# EAGLE board EndingsNanaPanel (EAGLE 9.6.2)
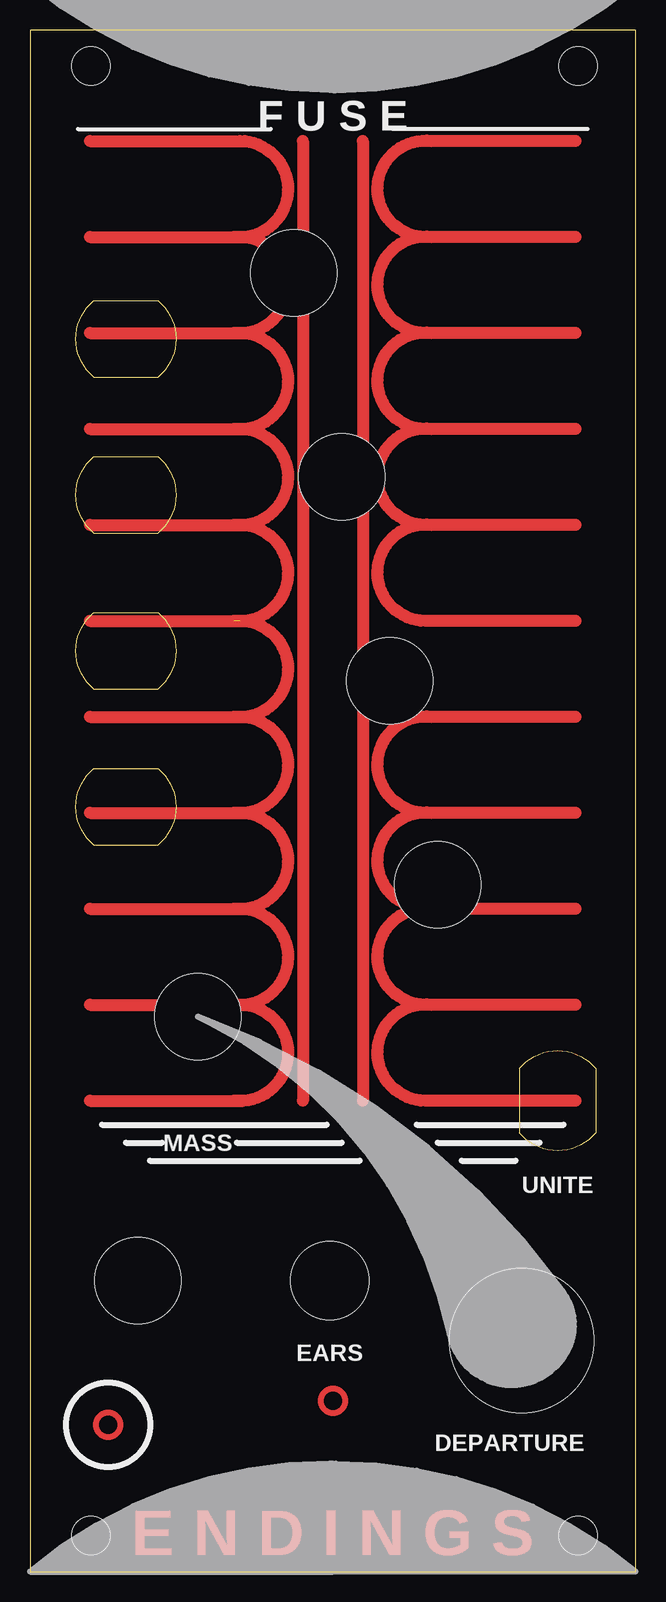
[diagram p0: board, top side]
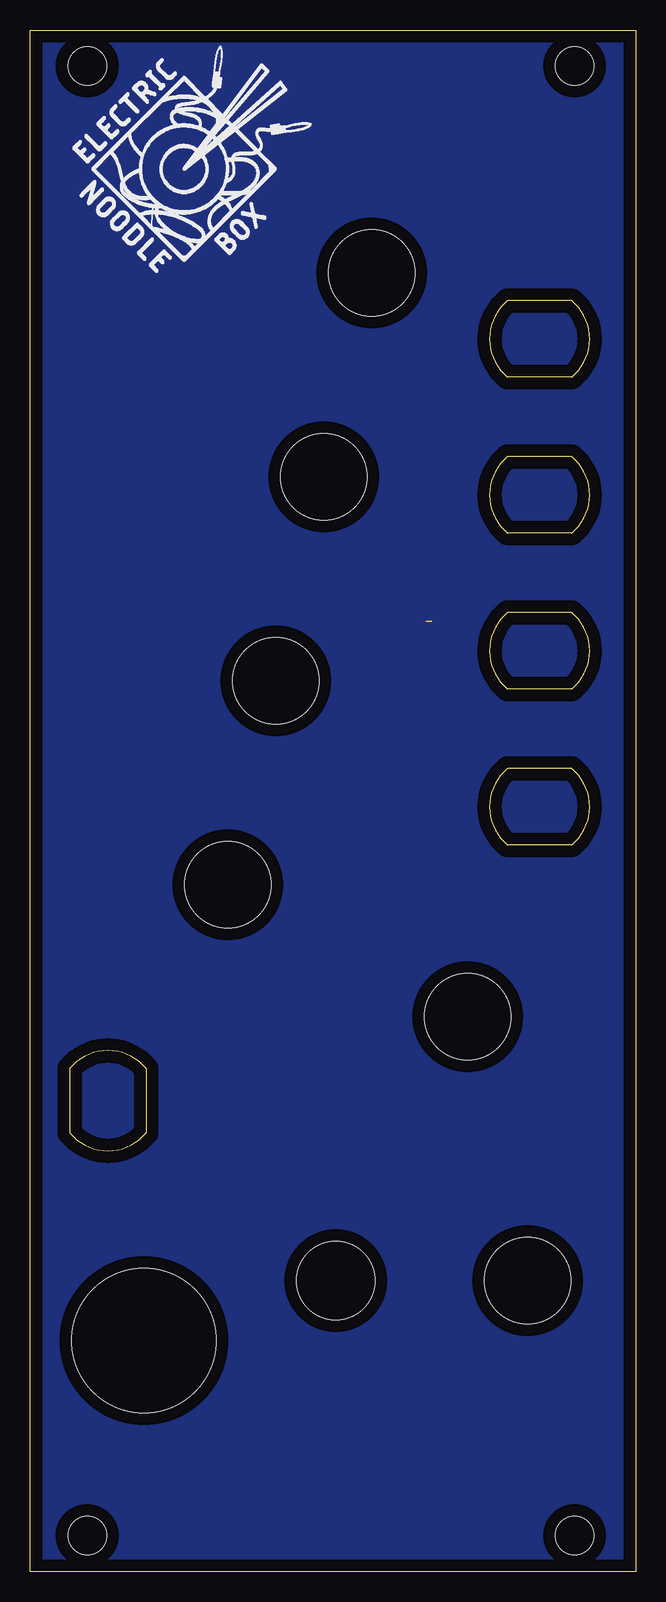
[diagram p1: board, bottom side, seen from below]

Size 50.5 x 128.5 mm. Coordinates in mm from the lower left corner, seen from the top.
Outline: 0,0 50.5,0 50.5,128.5 0,128.5 0,0
Copper layers (1*16): Top 0.035mm / dielectric 1.5mm / Bottom 0.035mm
Design rules "default": minimum track width 6mil, minimum drill 0.35mm, track to track 6mil, track to pad 6mil, pad to pad 6mil, via to via 6mil, smd to smd 6mil, copper to edge 40mil, drill to drill 6mil, minimum pad ring 10mil, minimum via ring 8mil, stop-mask expansion 4mil, vias tented up to drill 0mil, thermal gap 10mil
Holes 3.2 mm at 5.08,3 45.72,3 5.08,125.5 45.72,125.5

## Footprints (pad centres in the part's own frame; a part is rotated, then mirrored left to right if it is on the bottom)
ALPHA9MM_POT_CUTOUT = hole 7.2: 0,0
MINIJACK_M6_CUTOUT = hole 6.5: 0,0
NEUTRIK_6.35_CUTOUT = hole 12: 0,0

## Placement (x,y rotation side)
E$1  [CINCH_BANANA_CUTOUT]  8,76.75 90 top
E$2  [ALPHA9MM_POT_CUTOUT]  22,108.25 0 top
E$3  [CINCH_BANANA_CUTOUT]  8,102.75 90 top
E$4  [CINCH_BANANA_CUTOUT]  8,89.75 90 top
E$5  [CINCH_BANANA_CUTOUT]  8,63.75 90 top
E$6  [CINCH_BANANA_CUTOUT]  44,39.25 0 top
E$7  [ALPHA9MM_POT_CUTOUT]  26,91.25 0 top
E$8  [ALPHA9MM_POT_CUTOUT]  30,74.25 0 top
E$9  [ALPHA9MM_POT_CUTOUT]  34,57.25 0 top
E$10  [ALPHA9MM_POT_CUTOUT]  14,46.25 0 top
E$11  [ALPHA9MM_POT_CUTOUT]  9,24.25 0 top
E$12  [MINIJACK_M6_CUTOUT]  25,24.25 0 top
E$13  [NEUTRIK_6.35_CUTOUT]  41,19.25 0 top
E$14  [LOGO20X20]  47,107.75 0 bottom

## Library data of the parts
E$1-E$14 = ElectricNoodleBox

## Tracks (layer width: path | path; a pad name or v marks a point on that pad's centre or on a via)
GND
  pour Bottom: 0,0 50.5,0 50.5,128.5 0,128.5
S$1
  Top 1: 22.75,119.25 22.75,39.25
S$2
  Top 1: 27.75,119.25 27.75,39.25
S$3
  Top 1: 5,119.25 17.5,119.25
S$4
  Top 1: 5,111.25 17,111.25
S$5
  Top 1: 17,111.25 17.75,111.25
S$6
  Top 1: 17.5,119.25 arc-187 17,111.25
S$11
  Top 1: 5,111.25 17.5,111.25
S$12
  Top 1: 5,103.25 17,103.25
S$13
  Top 1: 17,103.25 17.75,103.25
S$14
  Top 1: 17.5,111.25 arc-187 17,103.25
S$19
  Top 1: 5,103.25 17.5,103.25
S$20
  Top 1: 5,95.25 17,95.25
S$21
  Top 1: 17,95.25 17.75,95.25
S$22
  Top 1: 17.5,103.25 arc-187 17,95.25
S$27
  Top 1: 5,95.25 17.5,95.25
S$28
  Top 1: 5,87.25 17,87.25
S$29
  Top 1: 17,87.25 17.75,87.25
S$30
  Top 1: 17.5,95.25 arc-187 17,87.25
S$39
  Top 1: 5,79.25 17.5,79.25
S$40
  Top 1: 5,71.25 17,71.25
S$41
  Top 1: 17,71.25 17.75,71.25
S$42  (1 unrouted)
  Top 1: 17.5,79.25 arc-187 17,71.25 | 17.5,87.25 arc-187 17,79.25
S$47
  Top 1: 5,71.25 17.5,71.25
S$48
  Top 1: 5,63.25 17,63.25
S$49
  Top 1: 17,63.25 17.75,63.25
S$50
  Top 1: 17.5,71.25 arc-187 17,63.25
S$55
  Top 1: 5,63.25 17.5,63.25
S$56
  Top 1: 5,55.25 17,55.25
S$57
  Top 1: 17,55.25 17.75,55.25
S$58
  Top 1: 17.5,63.25 arc-187 17,55.25
S$63
  Top 1: 5,55.25 17.5,55.25
S$64
  Top 1: 5,47.25 17,47.25
S$65
  Top 1: 17,47.25 17.75,47.25
S$66
  Top 1: 17.5,55.25 arc-187 17,47.25
S$71
  Top 1: 5,71.25 17.5,71.25
S$72
  Top 1: 5,63.25 17,63.25
S$73
  Top 1: 17,63.25 17.75,63.25
S$74
  Top 1: 17.5,71.25 arc-187 17,63.25
S$79
  Top 1: 5,63.25 17.5,63.25
S$80
  Top 1: 5,55.25 17,55.25
S$81
  Top 1: 17,55.25 17.75,55.25
S$82
  Top 1: 17.5,63.25 arc-187 17,55.25
S$87
  Top 1: 5,55.25 17.5,55.25
S$88
  Top 1: 5,47.25 17,47.25
S$89
  Top 1: 17,47.25 17.75,47.25
S$90
  Top 1: 17.5,55.25 arc-187 17,47.25
S$95
  Top 1: 5,47.25 17.5,47.25
S$96
  Top 1: 5,39.25 17,39.25
S$97
  Top 1: 17,39.25 17.75,39.25
S$98
  Top 1: 17.5,47.25 arc-187 17,39.25
S$99
  Top 1: 45.5,39.25 33,39.25
S$100
  Top 1: 45.5,47.25 33.5,47.25
S$101
  Top 1: 33.5,47.25 32.75,47.25
S$102
  Top 1: 33,39.25 arc-187 33.5,47.25
S$107
  Top 1: 45.5,47.25 33,47.25
S$108
  Top 1: 45.5,55.25 33.5,55.25
S$109
  Top 1: 33.5,55.25 32.75,55.25
S$110
  Top 1: 33,47.25 arc-187 33.5,55.25
S$115
  Top 1: 45.5,55.25 33,55.25
S$116
  Top 1: 45.5,63.25 33.5,63.25
S$117
  Top 1: 33.5,63.25 32.75,63.25
S$118
  Top 1: 33,55.25 arc-187 33.5,63.25
S$123
  Top 1: 45.5,63.25 33,63.25
S$124
  Top 1: 45.5,71.25 33.5,71.25
S$125
  Top 1: 33.5,71.25 32.75,71.25
S$126
  Top 1: 33,63.25 arc-187 33.5,71.25
S$135
  Top 1: 45.5,79.25 33,79.25
S$136
  Top 1: 45.5,87.25 33.5,87.25
S$137
  Top 1: 33.5,87.25 32.75,87.25
S$138
  Top 1: 33,79.25 arc-187 33.5,87.25
S$143
  Top 1: 45.5,87.25 33,87.25
S$144
  Top 1: 45.5,95.25 33.5,95.25
S$145
  Top 1: 33.5,95.25 32.75,95.25
S$146
  Top 1: 33,87.25 arc-187 33.5,95.25
S$151
  Top 1: 45.5,95.25 33,95.25
S$152
  Top 1: 45.5,103.25 33.5,103.25
S$153
  Top 1: 33.5,103.25 32.75,103.25
S$154
  Top 1: 33,95.25 arc-187 33.5,103.25
S$159
  Top 1: 45.5,103.25 33,103.25
S$160
  Top 1: 45.5,111.25 33.5,111.25
S$161
  Top 1: 33.5,111.25 32.75,111.25
S$162
  Top 1: 33,103.25 arc-187 33.5,111.25
S$167
  Top 1: 45.5,87.25 33,87.25
S$168
  Top 1: 45.5,95.25 33.5,95.25
S$169
  Top 1: 33.5,95.25 32.75,95.25
S$170
  Top 1: 33,87.25 arc-187 33.5,95.25
S$175
  Top 1: 45.5,95.25 33,95.25
S$176
  Top 1: 45.5,103.25 33.5,103.25
S$177
  Top 1: 33.5,103.25 32.75,103.25
S$178
  Top 1: 33,95.25 arc-187 33.5,103.25
S$183
  Top 1: 45.5,103.25 33,103.25
S$184
  Top 1: 45.5,111.25 33.5,111.25
S$185
  Top 1: 33.5,111.25 32.75,111.25
S$186
  Top 1: 33,103.25 arc-187 33.5,111.25
S$191
  Top 1: 45.5,111.25 33,111.25
S$192
  Top 1: 45.5,119.25 33.5,119.25
S$193
  Top 1: 33.5,119.25 32.75,119.25
S$194
  Top 1: 33,111.25 arc-187 33.5,119.25
(copper drawn outside any net)
  shapes: Top circle x3

## Text on the board
Top: E N D I N G S
tPlace: F U S E | MASS | UNITE | EARS | DEPARTURE
tStop: E N D I N G S